# Altium PCB Sensor Bar 2.0 by GAO.PcbDoc (part 3 of 3)
Units mil, origin at the board's own origin, x right, y up, seen from the top; angles counter-clockwise.
Board outline 6710 x 1765 mil, 2 copper layers (Top Layer, Bottom Layer); 247 components, 162 nets, 624 pads, 280 vias.
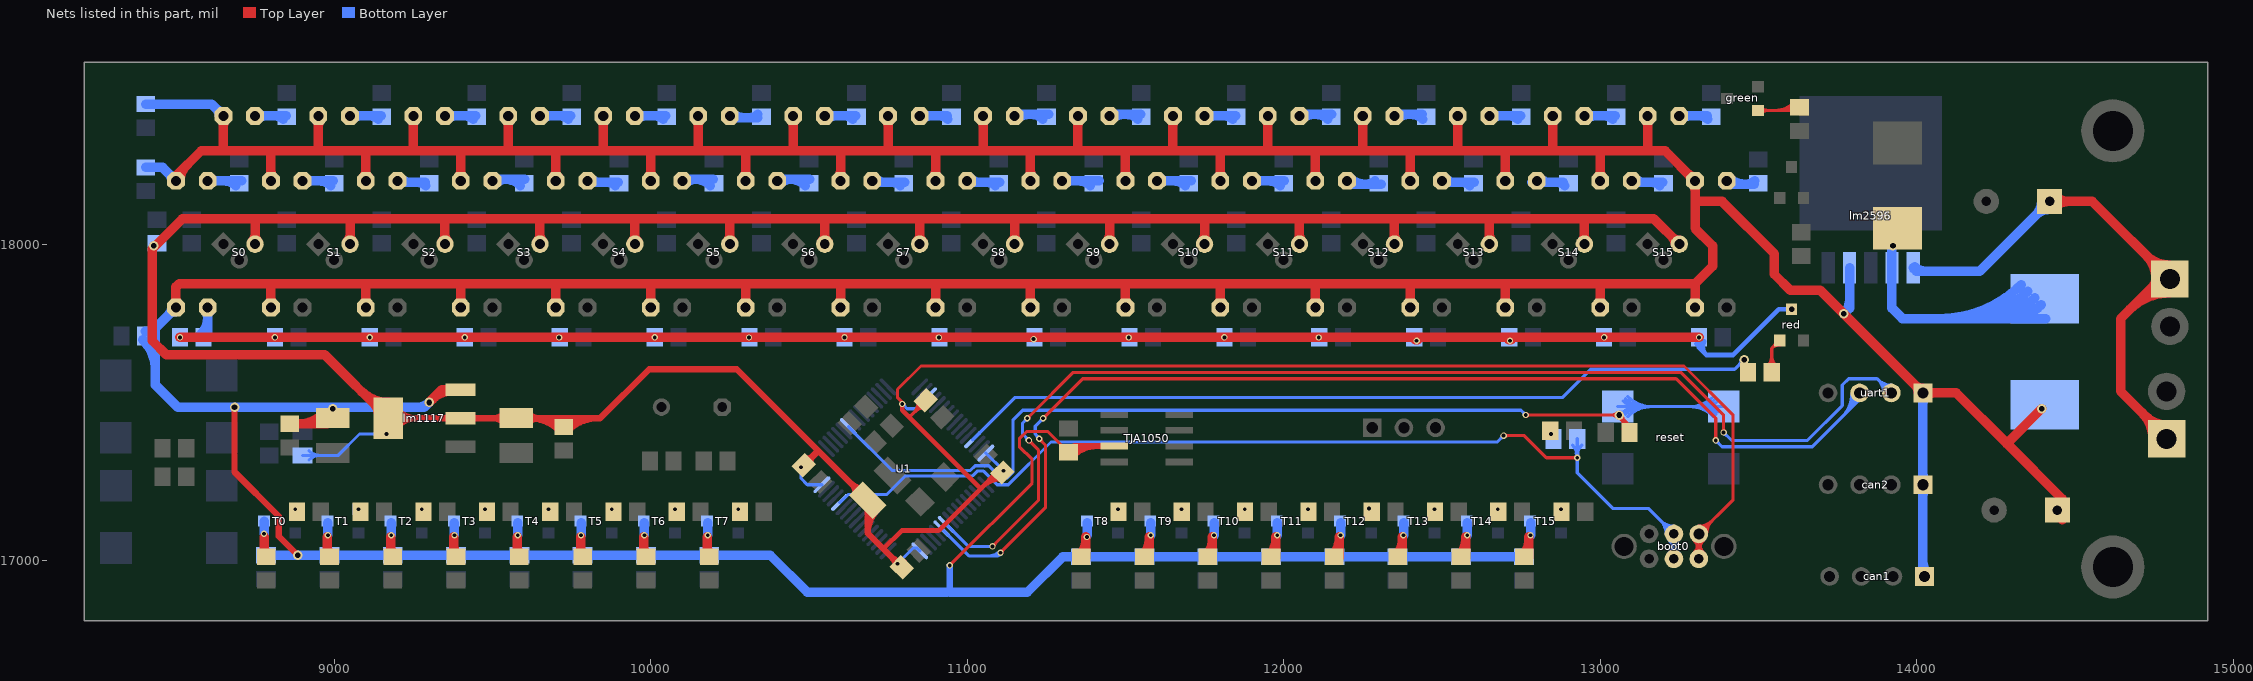
[diagram p3: the nets of this part, all layers, seen from the top]

## Via types
v1: diameter 30, hole 18, Top Layer to Bottom Layer, 141 vias
v2: diameter 20, hole 12, Top Layer to Bottom Layer, 139 vias

## Nets (pads, with @x,y where several pads share a name; then routed paths per layer and width w, separated by ;. In a path a pad name is that pad's centre, name@x,y a point inside that pad or via, vN(x,y) a via of type N, cw(c..) or ccw(c..) an arc to the next point about the centre after c; other vN are vias at no path point) (continued)
NetD17_2: D17.2 R20.2 | length 176
  Bottom Layer w30: D17.2@11159.19,18395.81 cw(c11193.46,18361.54) 11193.46,18410 ; D17.2@11159.61,18410 R20.2@11257.6,18410 ; 11203.02,18410 cw(c11203.02,18359.17) R20.2@11238.97,18395.11
NetD18_2: D18.2 R21.2 | length 176
  Bottom Layer w30: D18.2@11450,18410 R21.2@11547.99,18410 ; D18.2@11459.19,18395.81 cw(c11493.46,18361.54) 11493.46,18410 ; 11503.02,18410 cw(c11503.02,18359.17) R21.2@11538.97,18395.11
NetD19_2: D19.2 R22.2 | length 173.8
  Bottom Layer w30: D19.2@11750,18405 R22.2@11847.99,18405 ; D19.2@11759.19,18395.81 cw(c11781.38,18373.62) 11781.38,18405 cw(c11781.38,18436.38) D19.2@11759.19,18414.19 ; 11815.1,18405 cw(c11815.1,18371.24) R22.2@11838.97,18395.11
NetD20_2: D20.2 R23.2 | length 176
  Bottom Layer w30: D20.2@12054.61,18410 R23.2@12152.6,18410 ; D20.2@12059.19,18395.81 cw(c12093.46,18361.54) 12093.46,18410 ; 12103.02,18410 cw(c12103.02,18359.17) R23.2@12138.97,18395.11
NetD21_2: D21.2 R24.2 | length 176
  Bottom Layer w30: D21.2@12339.61,18410 R24.2@12437.6,18410 ; D21.2@12359.19,18395.81 cw(c12393.46,18361.54) 12393.46,18410 ; 12403.02,18410 cw(c12403.02,18359.17) R24.2@12438.97,18395.11
NetD22_2: D22.2 R25.2 | length 173.8
  Bottom Layer w30: D22.2@12650.4,18405 R25.2@12748.39,18405 ; D22.2@12659.19,18395.81 cw(c12681.38,18373.62) 12681.38,18405 cw(c12681.38,18436.38) D22.2@12659.19,18414.19 ; 12715.49,18405 cw(c12715.49,18371.24) R25.2@12739.36,18395.11
NetD23_2: D23.2 R26.2 | length 173.8
  Bottom Layer w30: D23.2@12950.4,18405 R26.2@13048.39,18405 ; D23.2@12959.19,18395.81 cw(c12981.38,18373.62) 12981.38,18405 cw(c12981.38,18436.38) D23.2@12959.19,18414.19 ; 13015.49,18405 cw(c13015.49,18371.24) R26.2@13039.36,18395.11
NetD24_2: D24.2 R27.2 | length 173.8
  Bottom Layer w30: D24.2@13239.61,18405 R27.2@13337.6,18405 ; D24.2@13259.19,18395.81 cw(c13281.39,18373.61) 13281.39,18405 cw(c13281.38,18436.38) D24.2@13259.19,18414.19 ; 13315.49,18405 cw(c13315.49,18371.24) R27.2@13339.36,18395.11
NetD25_2: D25.2 R37.2 | length 173.8
  Bottom Layer w30: D25.2@8750,18405 R37.2@8847.99,18405 ; D25.2@8759.19,18395.81 cw(c8781.38,18373.62) 8781.38,18405 cw(c8781.38,18436.38) D25.2@8759.19,18414.19 ; 8815.1,18405 cw(c8815.1,18371.24) R37.2@8838.97,18395.11
NetD26_2: D26.2 R29.2 | length 173.8
  Bottom Layer w30: D26.2@9050,18405 R29.2@9147.99,18405 ; D26.2@9059.19,18395.81 cw(c9081.38,18373.62) 9081.38,18405 cw(c9081.38,18436.38) D26.2@9059.19,18414.19 ; 9115.1,18405 cw(c9115.1,18371.24) R29.2@9138.97,18395.11
NetD27_2: D27.2 R30.2 | length 173.8
  Bottom Layer w30: D27.2@9350,18405 R30.2@9447.99,18405 ; D27.2@9359.19,18395.81 cw(c9381.38,18373.62) 9381.38,18405 cw(c9381.38,18436.38) D27.2@9359.19,18414.19 ; 9415.1,18405 cw(c9415.1,18371.24) R30.2@9438.97,18395.11
NetD28_2: D28.2 R31.2 | length 173.8
  Bottom Layer w30: D28.2@9650,18405 R31.2@9747.99,18405 ; D28.2@9659.19,18395.81 cw(c9681.38,18373.62) 9681.38,18405 cw(c9681.38,18436.38) D28.2@9659.19,18414.19 ; 9715.1,18405 cw(c9715.1,18371.24) R31.2@9738.97,18395.11
NetD29_2: D29.2 R32.2 | length 173.8
  Bottom Layer w30: D29.2@9950,18405 R32.2@10047.99,18405 ; D29.2@9959.19,18395.81 cw(c9981.38,18373.62) 9981.38,18405 cw(c9981.38,18436.38) D29.2@9959.19,18414.19 ; 10015.1,18405 cw(c10015.1,18371.24) R32.2@10038.97,18395.11
NetD30_2: D30.2 R33.2 | length 163.1
  Bottom Layer w30: D30.2@10239.61,18400 R33.2@10337.6,18400 ; D30.2@10259.19,18414.19 ccw(c10293.46,18448.46) 10293.46,18400 ; 10314.61,18400 ccw(c10314.61,18434.44) R33.2@10338.97,18410.09
NetD31_2: D31.2 R34.2 | length 173.8
  Bottom Layer w30: D31.2@10549.61,18405 R34.2@10647.6,18405 ; D31.2@10559.19,18395.81 cw(c10581.38,18373.62) 10581.38,18405 cw(c10581.38,18436.38) D31.2@10559.19,18414.19 ; 10615.1,18405 cw(c10615.1,18371.24) R34.2@10638.97,18395.11
NetD32_2: D32.2 R35.2 | length 173.8
  Bottom Layer w30: D32.2@10839.61,18405 R35.2@10937.6,18405 ; D32.2@10859.19,18395.81 cw(c10881.39,18373.61) 10881.39,18405 cw(c10881.38,18436.38) D32.2@10859.19,18414.19 ; 10915.1,18405 cw(c10915.1,18371.24) R35.2@10938.97,18395.11
NetD33_2: D33.2 R39.2 | length 187.2
  Bottom Layer w30: D33.2@11309.19,18190.81 cw(c11331.38,18168.62) 11331.38,18200 cw(c11331.38,18231.38) D33.2@11309.19,18209.19 ; D33.2@11319.61,18200 R39.2@11417.6,18200 ; 11352.63,18200 cw(c11352.63,18149.16) R39.2@11388.57,18185.11
NetD34_2: D34.2 R40.2 | length 187.2
  Bottom Layer w30: D34.2@11609.19,18190.81 cw(c11631.38,18168.62) 11631.38,18200 cw(c11631.38,18231.38) D34.2@11609.19,18209.19 ; D34.2@11609.61,18200 R40.2@11707.6,18200 ; 11652.63,18200 cw(c11652.63,18149.16) R40.2@11688.57,18185.11
NetD35_2: D35.2 R41.2 | length 187.2
  Bottom Layer w30: D35.2@11904.61,18200 R41.2@12002.6,18200 ; D35.2@11909.19,18190.81 cw(c11931.38,18168.62) 11931.38,18200 cw(c11931.38,18231.38) D35.2@11909.19,18209.19 ; 11952.63,18200 cw(c11952.63,18149.16) R41.2@11988.57,18185.11
NetD36_2: D36.2 R42.2 | length 176.5
  Bottom Layer w30: D36.2@12209.19,18209.19 ccw(c12255.53,18255.53) 12255.53,18190 ; D36.2@12209.61,18190 R42.2@12307.6,18190 ; 12264.22,18190 ccw(c12264.22,18224.44) R42.2@12288.57,18200.09
NetD37_2: D37.2 R43.2 | length 162.6
  Bottom Layer w30: D37.2@12504.61,18195 R43.2@12602.6,18195 ; D37.2@12509.19,18209.19 ccw(c12543.46,18243.46) 12543.46,18195 ; 12564.7,18195 cw(c12564.7,18161.23) R43.2@12588.57,18185.11
NetD38_2: D38.2 R44.2 | length 162.6
  Bottom Layer w30: D38.2@12784.61,18195 R44.2@12882.6,18195 ; D38.2@12809.19,18209.19 ccw(c12843.46,18243.46) 12843.46,18195 ; 12864.7,18195 cw(c12864.7,18161.23) R44.2@12888.57,18185.11
NetD39_2: D39.2 R45.2 | length 162.6
  Bottom Layer w30: D39.2@13099.61,18195 R45.2@13197.6,18195 ; D39.2@13109.19,18209.19 ccw(c13143.46,18243.46) 13143.46,18195 ; 13164.7,18195 cw(c13164.7,18161.23) R45.2@13188.57,18185.11
NetD40_2: D40.2 R46.2 | length 176.5
  Bottom Layer w30: D40.2@13389.61,18190 R46.2@13487.6,18190 ; D40.2@13409.19,18209.19 ccw(c13455.53,18255.53) 13455.53,18190 ; 13464.22,18190 ccw(c13464.22,18224.44) R46.2@13488.57,18200.09
NetD41_2: D41.2 R54.2 | length 187.2
  Bottom Layer w30: D41.2@8899.61,18200 R54.2@8997.6,18200 ; D41.2@8909.19,18190.81 cw(c8931.38,18168.62) 8931.38,18200 cw(c8931.38,18231.38) D41.2@8909.19,18209.19 ; 8952.63,18200 cw(c8952.63,18149.16) R54.2@8988.57,18185.11
NetD42_2: D42.2 R47.2 | length 162.6
  Bottom Layer w30: D42.2@9189.61,18195 R47.2@9287.6,18195 ; D42.2@9209.19,18209.19 ccw(c9243.46,18243.46) 9243.46,18195 ; 9264.7,18195 cw(c9264.7,18161.23) R47.2@9288.57,18185.11
NetD43_2: D43.2 R48.2 | length 189.4
  Bottom Layer w30: D43.2@9504.61,18205 R48.2@9602.6,18205 ; D43.2@9509.19,18190.81 cw(c9543.46,18156.54) 9543.46,18205 ; 9540.56,18205 cw(c9540.56,18137.09) R48.2@9588.57,18185.11
NetD44_2: D44.2 R49.2 | length 162.6
  Bottom Layer w30: D44.2@9799.61,18195 R49.2@9897.6,18195 ; D44.2@9809.19,18209.19 ccw(c9843.46,18243.46) 9843.46,18195 ; 9864.7,18195 cw(c9864.7,18161.23) R49.2@9888.57,18185.11
NetD45_2: D45.2 R50.2 | length 189.4
  Bottom Layer w30: D45.2@10099.61,18205 R50.2@10197.6,18205 ; D45.2@10109.19,18190.81 cw(c10143.46,18156.54) 10143.46,18205 ; 10140.56,18205 cw(c10140.56,18137.09) R50.2@10188.57,18185.11
NetD46_2: D46.2 R51.2 | length 189.4
  Bottom Layer w30: D46.2@10404.61,18205 R51.2@10502.6,18205 ; D46.2@10409.19,18190.81 cw(c10443.46,18156.54) 10443.46,18205 ; 10440.56,18205 cw(c10440.56,18137.09) R51.2@10488.57,18185.11
NetD47_2: D47.2 R52.2 | length 162.6
  Bottom Layer w30: D47.2@10704.61,18195 R52.2@10802.6,18195 ; D47.2@10709.19,18209.19 ccw(c10743.46,18243.46) 10743.46,18195 ; 10764.7,18195 cw(c10764.7,18161.23) R52.2@10788.57,18185.11
NetD48_2: D48.2 R53.2 | length 162.6
  Bottom Layer w30: D48.2@11004.61,18195 R53.2@11102.6,18195 ; D48.2@11009.19,18209.19 ccw(c11043.46,18243.46) 11043.46,18195 ; 11064.7,18195 cw(c11064.7,18161.23) R53.2@11088.57,18185.11
NetD49_2: D49.2 R104.2 | length 187.2
  Bottom Layer w30: D49.2@8609.19,18190.81 cw(c8631.38,18168.62) 8631.38,18200 cw(c8631.38,18231.38) D49.2@8609.19,18209.19 ; D49.2@8609.61,18200 R104.2@8707.6,18200 ; 8652.63,18200 cw(c8652.63,18149.16) R104.2@8688.57,18185.11
NetD50_2: D50.2 R105.2 | length 185.2
  Bottom Layer w30: R105.2@8579.91,17716.82 ccw(c8531.42,17765.31) 8600,17765.31 ; D50.2@8590.81,17790.81 cw(c8568.62,17768.62) 8600,17768.62 cw(c8631.38,17768.62) D50.2@8609.19,17790.81 ; R105.2@8600,17717.99 D50.2@8600,17800
Netgreen_1: green.1 R36.2 | length 321.1
  Top Layer w10: green.1@13499.21,18422.6 R36.2@13620.2,18422.6 ; green.1@13509.19,18413.61 cw(c13530.9,18391.9) 13530.9,18422.6 cw(c13530.9,18453.3) green.1@13509.19,18431.59 ; 13552.69,18422.6 ccw(c13552.69,18505.78) R36.2@13611.5,18446.96 ; 13576.83,18422.6 ccw(c13576.83,18481.64) R36.2@13618.57,18439.89 ; 13600.02,18422.6 cw(c13600.02,18406.36) R36.2@13611.5,18417.84 ; R36.2@13600.97,18422.6 ccw(c13600.97,18457.49) R36.2@13625.65,18432.82
NetL2_1: L2.1 lm2596.2 schottky.1 | length 1535.4
  Bottom Layer w30: 13922,17848 lm2596.2@13922,17925 v1@13922,17992 ; lm2596.2@13922,17880 13922,17798 13955,17765 L2.1@14407.17,17765 ; 14070.99,17765 ccw(c14070.99,18131.66) L2.1@14330.25,17872.39 ; 14143.41,17765 ccw(c14143.41,18059.23) L2.1@14351.46,17851.18 ; 14215.84,17765 ccw(c14215.84,17986.8) L2.1@14372.68,17829.96 ; 14288.27,17765 ccw(c14288.27,17914.38) L2.1@14393.89,17808.75
  other v1: 13925,17995
NetR3_2: R3.2 v_usb.2
  other v2: 12845,17400
NetR28_2: R28.2 red.1 | length 237.5
  Top Layer w10: R28.2@13527.84,17613.5 ccw(c13492.69,17648.65) 13542.4,17648.65 ccw(c13592.11,17648.65) R28.2@13556.96,17613.5 ; R28.2@13542.4,17595 13542.4,17670.59 red.1@13567.6,17695.79 ; 13544.21,17672.4 cw(c13567.6,17649.01) red.1@13567.6,17682.09 ; 13546.59,17674.78 ccw(c13526.56,17694.8) red.1@13554.88,17694.8
NetR72_1: R72.1 T0.3 | length 133.4
  Top Layer w30: R72.1@8778.29,17009.11 8778.29,17075 ; 8778.29,17044.66 ccw(c8813.32,17044.66) R72.1@8788.55,17019.89
  Bottom Layer w30: v2(8778.29,17085) T0.3@8778.29,17125
NetR73_1: R73.1 T1.3 | length 133.4
  Top Layer w30: R73.1@8978.29,17009.11 v2@8978.29,17075 ; 8978.29,17044.66 ccw(c9013.32,17044.66) R73.1@8988.55,17019.89
  Bottom Layer w30: v2(8980,17080) T1.3@8980,17120
NetR74_1: R74.1 T2.3 | length 133.4
  Top Layer w30: R74.1@9178.29,17009.11 v2@9178.29,17075 ; 9178.29,17044.66 ccw(c9213.32,17044.66) R74.1@9188.55,17019.89
  Bottom Layer w30: v2(9180,17080) T2.3@9180,17120
NetR75_1: R75.1 T3.3 | length 133.4
  Top Layer w30: R75.1@9378.29,17009.11 v2@9378.29,17075 ; 9378.29,17044.66 ccw(c9413.32,17044.66) R75.1@9388.55,17019.89
  Bottom Layer w30: v2(9380,17080) T3.3@9380,17120
NetR76_1: R76.1 T4.3 | length 133.4
  Top Layer w30: R76.1@9578.29,17009.11 v2@9578.29,17075 ; 9578.29,17044.66 ccw(c9613.32,17044.66) R76.1@9588.55,17019.89
  Bottom Layer w30: v2(9580,17080) T4.3@9580,17120
NetR77_1: R77.1 T5.3 | length 133.4
  Top Layer w30: R77.1@9778.29,17009.11 v2@9778.29,17075 ; 9778.29,17044.66 ccw(c9813.32,17044.66) R77.1@9788.55,17019.89
  Bottom Layer w30: v2(9780,17080) T5.3@9780,17120
NetR78_1: R78.1 T6.3 | length 133.4
  Top Layer w30: R78.1@9978.29,17009.11 v2@9978.29,17075 ; 9978.29,17044.66 ccw(c10013.32,17044.66) R78.1@9988.55,17019.89
  Bottom Layer w30: v2(9980,17080) T6.3@9980,17120
NetR79_1: R79.1 T7.3 | length 133.4
  Top Layer w30: R79.1@10178.29,17009.11 v2@10178.29,17075 ; 10178.29,17044.66 ccw(c10213.32,17044.66) R79.1@10188.55,17019.89
  Bottom Layer w30: v2(10180,17080) T7.3@10180,17120
NetR80_1: R80.1 T0.1
  other v2: 8876.72,17162.4
NetR81_1: R81.1 T1.1
  other v2: 9076.72,17162.4
NetR82_1: R82.1 T2.1
  other v2: 9276.72,17162.4
NetR83_1: R83.1 T3.1
  other v2: 9476.72,17162.4
NetR84_1: R84.1 T4.1
  other v2: 9676.72,17162.4
NetR85_1: R85.1 T5.1
  other v2: 9876.72,17162.4
NetR86_1: R86.1 T6.1
  other v2: 10076.72,17162.4
NetR87_1: R87.1 T7.1
  other v2: 10276.72,17162.4
NetR88_1: R88.1 T8.3 | length 155.6
  Top Layer w30: R88.1@11356.45,17019.89 ccw(c11311.66,17064.68) 11375,17064.68 ; R88.1@11375,17009.11 v2@11375,17075
  Bottom Layer w30: v2@11380,17080 T8.3@11380,17120
  other v2: 11378.29,17075
NetR89_1: R89.1 T9.3 | length 155.6
  Top Layer w30: R89.1@11556.45,17019.89 ccw(c11511.66,17064.68) 11575,17064.68 ; R89.1@11575,17009.11 v2@11575,17075
  Bottom Layer w30: v2(11580,17080) T9.3@11580,17120
NetR90_1: R90.1 T10.3 | length 155.6
  Top Layer w30: R90.1@11756.45,17019.89 ccw(c11711.66,17064.68) 11775,17064.68 ; R90.1@11775,17009.11 v2@11775,17075
  Bottom Layer w30: v2(11780,17080) T10.3@11780,17120
NetR91_1: R91.1 T11.3 | length 155.6
  Top Layer w30: R91.1@11956.45,17019.89 ccw(c11911.66,17064.68) 11975,17064.68 ; R91.1@11975,17009.11 v2@11975,17075
  Bottom Layer w30: v2(11980,17080) T11.3@11980,17120
NetR92_1: R92.1 T12.3 | length 155.6
  Top Layer w30: R92.1@12156.45,17019.89 ccw(c12111.66,17064.68) 12175,17064.68 ; R92.1@12175,17009.11 v2@12175,17075
  Bottom Layer w30: v2(12180,17080) T12.3@12180,17120
NetR93_1: R93.1 T13.3 | length 155.6
  Top Layer w30: R93.1@12356.45,17019.89 ccw(c12311.66,17064.68) 12375,17064.68 ; R93.1@12375,17009.11 v2@12375,17075
  Bottom Layer w30: v2@12380,17080 T13.3@12380,17120
  other v2: 12378.29,17080
NetR94_1: R94.1 T14.3 | length 155.6
  Top Layer w30: R94.1@12556.45,17019.89 ccw(c12511.66,17064.68) 12575,17064.68 ; R94.1@12575,17009.11 v2@12575,17075
  Bottom Layer w30: v2(12580,17080) T14.3@12580,17120
NetR95_1: R95.1 T15.3 | length 155.6
  Top Layer w30: R95.1@12756.45,17019.89 ccw(c12711.66,17064.68) 12775,17064.68 ; R95.1@12775,17009.11 v2@12775,17075
  Bottom Layer w30: v2(12780,17080) T15.3@12780,17120
NetR96_1: R96.1 T8.1
  other v2: 11476.72,17162.4
NetR97_1: R97.1 T9.1
  other v2: 11676.72,17162.4
NetR98_1: R98.1 T10.1
  other v2: 11876.72,17162.4
NetR99_1: R99.1 T11.1
  other v2: 12076.72,17162.4
NetR100_1: R100.1 T12.1
  other v2: 12270,17165
NetR101_1: R101.1 T13.1
  other v2: 12476.72,17162.4
NetR102_1: R102.1 T14.1
  other v2: 12676.72,17162.4
NetR103_1: R103.1 T15.1
  other v2: 12876.72,17162.4
NRST: C13.1 reset.2 U1.7 | length 4233.9
  Top Layer w10: v2(12765,17460) v1(13060,17460) ; v2@12768.54,17456.46 cw(c12777.07,17447.93) 12777.07,17460 cw(c12777.07,17472.07) v2@12768.54,17463.54 ; v1@13052.93,17452.93 ccw(c13035.86,17435.86) 13035.86,17460 ccw(c13035.86,17484.14) v1@13052.93,17467.07 ; v1@13060,17450 cw(c13060,17425.86) 13077.07,17442.93 cw(c13094.14,17460) v1@13070,17460 ; v1@13062.32,17450.27 cw(c13064.71,17440.22) 13073.66,17445.39 ; v1@13069.66,17457.41 ccw(c13092.98,17451.16) 13072.07,17439.09 ccw(c13051.16,17427.02) 13057.41,17450.34 cw(c13047.17,17412.11) C13.1@13081.45,17431.9 ; 13072.35,17447.65 cw(c13045.77,17421.07) C13.1@13082.15,17411.6 ; C13.1@13072.47,17414.12 ccw(c13026.17,17426.17) v1(13060,17460) ; 13084.7,17435.3 cw(c13065.38,17415.97) C13.1@13091.83,17409.09 ; C13.1@13092.4,17427.6 v1(13060,17460)
  Bottom Layer w10: U1.7@10624.62,17423.63 10763.24,17285 11010,17285 11025,17300 11067.9,17300 11105.89,17262.01 11127.01,17262.01 11145,17280 11145,17445 11175,17475 12750,17475 v2(12765,17460) ; v2@12760,17460 ccw(c12747.93,17460) 12756.46,17468.54 ccw(c12765,17477.07) v2@12765,17465 ; reset.2@13055.35,17486.85 reset.2@13390,17486.85 ; reset.2@13062.59,17469.66 ccw(c13067.57,17488.27) reset.2@13077.21,17471.58 ; reset.2@13069.66,17457.41 cw(c13097.69,17449.9) reset.2@13083.18,17475.03 ; reset.2@13073.03,17469.17 cw(c13115.71,17426.5) 13115.71,17486.85 cw(c13115.71,17547.21) reset.2@13073.03,17504.53 ; reset.2@13080.1,17462.1 cw(c13139.85,17402.35) 13139.85,17486.85 cw(c13139.85,17571.35) reset.2@13080.1,17511.6 ; reset.2@13087.17,17455.03 cw(c13163.99,17378.21) 13163.99,17486.85 cw(c13163.99,17595.49) reset.2@13087.17,17518.67 ; reset.2@13358.18,17455.03 ccw(c13281.36,17378.21) 13281.36,17486.85 ccw(c13281.36,17595.49) reset.2@13358.18,17518.67 ; reset.2@13365.25,17462.1 ccw(c13305.5,17402.35) 13305.5,17486.85 ccw(c13305.5,17571.35) reset.2@13365.25,17511.6 ; reset.2@13372.32,17469.17 ccw(c13329.64,17426.5) 13329.64,17486.85 ccw(c13329.64,17547.21) reset.2@13372.32,17504.53
RED: R28.1 U1.29 | length 2691
  Top Layer w10: v1@13447.93,17627.93 cw(c13430.86,17610.86) 13455,17610.86 cw(c13479.14,17610.86) v1@13462.07,17627.93 ; R28.1@13455,17607.6 v1(13455,17635) ccw(c13470.6,17635) R28.1@13469.3,17619.46 ; R28.1@13455,17624.13 ccw(c13469.69,17624.13) R28.1@13468.48,17609.49
  Bottom Layer w10: U1.29@11017.14,17381.87 11150.27,17515 12880,17515 12970,17605 13425,17605 v1(13455,17635) ; v1@13445,17635 cw(c13420.86,17635) 13437.93,17617.93 cw(c13455,17600.86) v1@13455,17625
REDGND: R4.1 R5.1 R6.1 R7.1 R8.1 R9.1 R10.1 R11.1 R12.1 R13.1 R14.1 R15.1 R16.1 R17.1 R18.1 R19.1 R105.1 red.3 | length 5425.5
  Top Layer w30: v2(8512.6,17705.4) v2(8812.6,17705.4) v2(9112.6,17705.4) v2(9412.6,17705.4) v2(10012.6,17705.4) v2(10612.6,17705.4) v2(11812.6,17705.4) 12715,17705.4 v2(13012.6,17705.4) v2(13312.6,17705.4) ; 12406.97,17705.4 cw(c12406.97,17681.97) v2@12423.54,17698.54 ; v2@12416.46,17698.54 cw(c12433.03,17681.97) 12433.03,17705.4 ; 12701.97,17705.4 cw(c12701.97,17681.97) v2@12718.54,17698.54 ; v2@12711.46,17698.54 cw(c12728.03,17681.97) 12728.03,17705.4
  Bottom Layer w15: R18.1@13304.62,17685.22 cw(c13298.31,17672.4) 13312.6,17672.4 ; R18.1@13310.73,17703.74 cw(c13301.18,17695.32) R18.1@13313.59,17692.45 ; v2(13312.6,17705.4) 13312.6,17672.4 ; R18.1@13315.33,17700.01 ccw(c13342.1,17685.78) 13320.66,17664.34 ; R18.1@13320.58,17685.22 ccw(c13326.89,17672.4) 13312.6,17672.4 ; R18.1@13328.57,17692.97 ccw(c13360.82,17675.83) 13335,17650 ; v1@13599.7,17788.91 ccw(c13586.89,17776.11) 13586.89,17794.21 ccw(c13586.89,17812.32) v1@13599.7,17799.52 ; v1(13605,17794.21) 13564.21,17794.21 13420,17650 13335,17650 ; 13312.6,17672.4 13335,17650
  other v2: 12420,17695 12715,17695 11210,17700 9710.63,17705 10310.63,17705 10910.63,17705 11510.63,17705 12110.63,17705
UART1_RX: U1.43 uart1.3 | length 3952
  Top Layer w10: v2(11105,17025) 11247,17167 11247,17365.5 v2(11227.5,17385) ; v2@11105,17030 ccw(c11105,17042.07) 11113.54,17033.54 ccw(c11122.07,17025) v2@11110,17025 ; v2@11227.5,17380 cw(c11227.5,17367.93) 11236.04,17376.46 cw(c11244.57,17385) v2@11232.5,17385 ; v2(11240,17450) 11365,17575 13240,17575 13365,17450 v2(13365,17380) ; v2@11240,17455 ccw(c11240,17467.07) 11248.54,17458.54 ccw(c11257.07,17450) v2@11245,17450 ; v2@13361.46,17383.54 ccw(c13352.93,17392.07) 13365,17392.07 ccw(c13377.07,17392.07) v2@13368.54,17383.54
  Bottom Layer w10: U1.43@10919.71,17100.7 11005.4,17015 11095,17015 v2(11105,17025) ; 11068.79,17015 ccw(c11068.79,17061.21) v2@11101.46,17028.54 ; 11092.93,17015 ccw(c11092.93,17037.07) v2@11108.54,17021.46 ; 11217.2,17397.8 cw(c11204.39,17385) v2@11222.5,17385 ; v2(11227.5,17385) 11230,17385 11215,17400 11215,17425 v2(11240,17450) ; v2@11235,17450 cw(c11222.93,17450) 11231.46,17441.46 cw(c11240,17432.93) v2@11240,17445 ; v2@13365,17375 cw(c13365,17362.93) 13373.54,17371.46 cw(c13382.07,17380) v2@13370,17380 ; v2(13365,17380) 13385,17360 13670,17360 uart1.3@13830,17520 ; 13763.99,17453.99 ccw(c13687.97,17530) uart1.3@13795.47,17530 ; 13781.06,17471.06 ccw(c13722.12,17530) uart1.3@13805.47,17530 ; 13798.13,17488.13 ccw(c13756.26,17530) uart1.3@13815.47,17530
UART1_TX: U1.42 uart1.2 | length 4034.8
  Top Layer w10: v2(11080,17045) 11225,17190 11225,17350 v2(11195,17380) ; v2@11080,17050 ccw(c11080,17062.07) 11088.54,17053.54 ccw(c11097.07,17045) v2@11085,17045 ; v2(11190,17450) 11200,17460 11335,17595 13255,17595 13390,17460 v2(13390,17405) ; v2@11195,17375 cw(c11195,17362.93) 11203.54,17371.46 cw(c11212.07,17380) v2@11200,17380 ; v2@13386.46,17408.54 ccw(c13377.93,17417.07) 13390,17417.07 ccw(c13402.07,17417.07) v2@13393.54,17408.54 ; v2@11190,17455 ccw(c11190,17467.07) 11198.54,17458.54 ; v2@11190,17455 ccw(c11190,17467.07) 11198.54,17458.54 ; v2@11190,17455 ccw(c11190,17467.07) 11198.54,17458.54 ; v2@11195,17450 cw(c11207.07,17450) 11198.54,17458.54 ; v2@11195,17450 cw(c11207.07,17450) 11198.54,17458.54 ; v2@11195,17450 cw(c11207.07,17450) 11198.54,17458.54
  Bottom Layer w10: U1.42@10933.63,17114.62 11003.24,17045 v2(11080,17045) ; v2@11185,17450 cw(c11172.93,17450) 11181.46,17441.46 cw(c11190,17432.93) v2@11190,17445 ; v2@11190,17380 ccw(c11177.93,17380) 11186.46,17388.54 ccw(c11195,17397.07) v2@11195,17385 ; v2(11190,17450) 11175,17435 11175,17400 v2(11195,17380) ; v2@13390,17400 cw(c13390,17387.93) 13398.54,17396.46 cw(c13407.07,17405) v2@13395,17405 ; v2(13390,17405) 13415,17380 13655,17380 13765,17490 13765,17555 13785,17575 13875,17575 uart1.2@13920,17530 ; uart1.2@13895.47,17530 ccw(c13836.26,17530) 13878.13,17571.87 ccw(c13920,17613.74) uart1.2@13920,17554.53 ; uart1.2@13905.47,17530 ccw(c13870.4,17530) 13895.2,17554.8 ccw(c13920,17579.6) uart1.2@13920,17544.53
USB: boot0.3 boot0.4 U1.60 v_usb.1 | length 3792.5
  Top Layer w10: v2(12695,17395) 12760,17395 12830,17325 v2(12927.4,17325) ; v2@12698.54,17391.46 cw(c12707.07,17382.93) 12707.07,17395 cw(c12707.07,17407.07) v2@12698.54,17398.54 ; v2@12923.87,17321.46 ccw(c12915.33,17312.93) 12915.33,17325 ccw(c12915.33,17337.07) v2@12923.87,17328.54
  Bottom Layer w10: U1.60@10596.78,17184.21 10599.29,17184.21 10624.16,17209.08 10746.08,17209.08 10805,17268 11017.04,17268 11032.04,17283 11052,17283 11095,17240 11130,17240 11265,17375 12675,17375 v2(12695,17395) ; v2@12690,17395 cw(c12677.93,17395) 12686.46,17386.46 cw(c12695,17377.93) v2@12695,17390 ; v_usb.1@12912.84,17364.53 cw(c12877.69,17329.38) 12927.4,17329.38 cw(c12977.11,17329.38) v_usb.1@12941.96,17364.53 ; v2@12923.07,17327.5 ccw(c12909.26,17335.47) 12924.66,17339.6 ; v2@12923.87,17321.46 cw(c12915.33,17312.93) 12927.4,17312.93 cw(c12939.47,17312.93) v2@12930.94,17321.46 ; v2@12923.87,17328.54 ccw(c12915.33,17337.07) 12927.4,17337.07 ccw(c12939.47,17337.07) v2@12930.94,17328.54 ; v_usb.1@12927.4,17385 12927.4,17277.6 13040,17165 13152.52,17165 boot0.4@13233.15,17084.37 boot0.3@13233.15,17005.63 ; 12930.14,17339.6 ccw(c12945.54,17335.47) v2@12931.73,17327.5 ; boot0.4@13208.62,17084.37 ccw(c13149.41,17084.37) 13191.28,17126.24 ccw(c13233.15,17168.11) boot0.4@13233.15,17108.9 ; boot0.3@13215.81,17022.97 ccw(c13173.94,17064.84) 13233.15,17064.84 ccw(c13292.36,17064.84) boot0.3@13250.49,17022.97 ; boot0.4@13215.81,17067.03 cw(c13173.94,17025.16) 13233.15,17025.16 cw(c13292.36,17025.16) boot0.4@13250.49,17067.03 ; boot0.4@13218.62,17084.37 ccw(c13183.55,17084.37) 13208.35,17109.17 ccw(c13233.15,17133.97) boot0.4@13233.15,17098.9 ; boot0.4@13219.77,17063.81 cw(c13209.77,17048.44) 13227.48,17043.69 cw(c13254.39,17036.48) boot0.4@13243.1,17061.95 ; boot0.3@13222.88,17015.9 ccw(c13198.08,17040.7) 13233.15,17040.7 ccw(c13268.22,17040.7) boot0.3@13243.42,17015.9 ; boot0.4@13222.88,17074.1 cw(c13198.08,17049.3) 13233.15,17049.3 cw(c13268.22,17049.3) boot0.4@13243.42,17074.1 ; boot0.4@13223.2,17061.95 cw(c13211.91,17036.48) 13238.82,17043.69 cw(c13256.53,17048.44) boot0.4@13246.53,17063.81
VCC3.3V: 1.1 boot0.1 boot0.2 C4.2 C5.2 C6.2 C7.2 C14.2 C17.1 C21.1 L1.2 lm1117.2 lm1117.4 S0.3 S1.3 S2.3 S3.3 S4.3 S5.3 S6.3 S7.3 S8.3 S9.3 S10.3 S11.3 S12.3 S13.3 S14.3 S15.3 U1.19 U1.32 U1.48 U1.64 | length 17116.3
  Top Layer w10: v2(10795,17495) 10795,17500.52 10779.63,17515.89 10779.63,17534.48 10780,17534.85 10780,17540.99 10854.01,17615 13265,17615 13420,17460 13420,17192.48 boot0.2@13311.89,17084.37 boot0.1@13311.89,17005.63 ; 10817.5,17452.5 10868.55,17503.55 C7.2@10868.55,17506.45 ; 10828.57,17463.57 ccw(c10788.48,17503.66) C7.2@10845.18,17503.66 ; 10835.56,17470.56 cw(c10865.77,17440.35) C7.2@10865.77,17483.07 ; 10845.64,17480.64 ccw(c10822.62,17503.66) C7.2@10855.18,17503.66 ; boot0.1@13294.55,17022.97 ccw(c13252.68,17064.84) 13311.89,17064.84 ccw(c13371.11,17064.85) boot0.1@13329.23,17022.97 ; boot0.2@13294.55,17067.03 cw(c13252.68,17025.16) 13311.89,17025.16 cw(c13371.1,17025.16) boot0.2@13329.23,17067.03 ; boot0.2@13298.51,17063.81 cw(c13288.51,17048.44) 13306.22,17043.69 cw(c13333.13,17036.48) boot0.2@13321.84,17061.95 ; boot0.1@13301.62,17015.9 ccw(c13276.82,17040.7) 13311.89,17040.7 ccw(c13346.96,17040.7) boot0.1@13322.16,17015.9 ; boot0.2@13301.62,17074.1 cw(c13276.82,17049.3) 13311.89,17049.3 cw(c13346.96,17049.3) boot0.2@13322.16,17074.1 ; boot0.2@13301.94,17061.95 cw(c13290.65,17036.48) 13317.56,17043.69 cw(c13335.27,17048.44) boot0.2@13325.27,17063.81 ; boot0.2@13311.89,17098.9 ccw(c13311.89,17133.97) 13336.69,17109.17 ccw(c13361.49,17084.37) boot0.2@13326.42,17084.37 ; boot0.2@13311.89,17108.9 ccw(c13311.89,17168.11) 13353.76,17126.24 ccw(c13395.63,17084.37) boot0.2@13336.42,17084.37
  Top Layer w15: 10735,17037.11 10792.89,17095 10910,17095 11042.5,17227.5 ; v2(10795,17495) 10795,17475 10817.5,17452.5 ; 10817.5,17455.39 10817.5,17452.5 ; 11047.23,17232.23 cw(c11108.66,17170.8) C6.2@11108.66,17257.68 ; 11072.84,17257.84 cw(c11108.66,17222.02) C6.2@11108.66,17272.68 ; C6.2@11093.55,17278.55 11042.5,17227.5 ; 10817.5,17452.5 11042.5,17227.5
  Top Layer w20: lm1117.4@9170.83,17450 lm1117.2@9399.17,17450 9840,17450 9995,17605 10272.05,17605 L1.2@10686.03,17191.03 10686.03,17086.08 10735,17037.11 C4.2@10793.55,16978.55 ; lm1117.4@9197.16,17423.66 cw(c9260.74,17360.08) 9260.74,17450 cw(c9260.74,17539.92) lm1117.4@9197.16,17476.34 ; lm1117.2@9364.77,17443.15 ccw(c9348.23,17426.62) 9348.23,17450 ccw(c9348.23,17473.38) lm1117.2@9364.77,17456.85 ; lm1117.2@9433.58,17443.15 cw(c9450.11,17426.62) 9450.11,17450 cw(c9450.11,17473.38) lm1117.2@9433.58,17456.85 ; 9501.17,17450 ccw(c9501.17,17502.3) C17.1@9538.15,17465.32 ; 9501.74,17450 cw(c9501.74,17398.51) C17.1@9538.15,17434.92 ; C17.1@9611.85,17434.92 cw(c9648.26,17398.51) 9648.26,17450 ; C17.1@9611.85,17465.32 ccw(c9648.83,17502.3) 9648.83,17450 ; C17.1@9616.8,17450 cw(c9616.8,17318.13) C14.2@9710.04,17411.38 ; 9665.08,17450 cw(c9665.08,17366.42) C14.2@9724.18,17425.52 ; C14.2@9711.68,17439.66 cw(c9736.64,17414.7) 9736.64,17450 ; 9713.36,17450 cw(c9713.36,17414.7) C14.2@9738.32,17439.66 ; C14.2@9725.82,17425.52 cw(c9784.92,17366.42) 9784.92,17450 ; C14.2@9739.96,17411.38 cw(c9833.2,17318.13) 9833.2,17450 ; v2(10475,17295) ccw(c10465.04,17310.6) 10483.55,17310.6 C5.2@10483.55,17301.45 10527.05,17344.94 ; C5.2@10486.34,17319.82 ccw(c10486.34,17357.46) 10512.95,17330.85 ccw(c10539.57,17304.23) C5.2@10501.93,17304.23 ; L1.2@10649.22,17206.34 ccw(c10597.32,17206.34) 10634.02,17243.03 ccw(c10670.71,17279.73) L1.2@10670.71,17227.83 ; 10686.03,17086.85 cw(c10790.2,17086.85) L1.2@10716.54,17160.51 ; 10686.03,17135.14 cw(c10741.91,17135.14) L1.2@10702.39,17174.66 ; 10766.6,17006.62 cw(c10753.24,16982.14) v2(10780,16990) ; 10769.03,17004.3 ccw(c10791.78,17010.4) v2(10780,16990) ; C4.2@10775.18,16981.34 ccw(c10737.54,16981.34) 10764.15,17007.95 ccw(c10790.77,17034.57) C4.2@10790.77,16996.93 ; C4.2@10800.15,16995.92 ccw(c10797.22,16968.64) v2(10780,16990)
  Top Layer w30: S0.3@8741.12,18008.88 ccw(c8719.68,18030.32) 8750,18030.32 ccw(c8780.32,18030.32) S0.3@8758.88,18008.88 ; S0.3@8750,18000 8750,18080 ; S1.3@9041.12,18008.88 ccw(c9019.68,18030.32) 9050,18030.32 ccw(c9080.32,18030.32) S1.3@9058.88,18008.88 ; S1.3@9050,18000 9050,18080 ; 9085.54,17535.29 ccw(c9170.83,17620.58) lm1117.4@9170.83,17499.96 ; lm1117.4@9128.31,17492.52 cw(c9103.51,17467.72) lm1117.4@9138.58,17467.72 ; lm1117.4@9170.83,17450 8970.83,17650 8470,17650 8425,17695 8425,17985 8520,18080 8750,18080 ; S2.3@9341.12,18008.88 ccw(c9319.68,18030.32) 9350,18030.32 ccw(c9380.32,18030.32) S2.3@9358.88,18008.88 ; S2.3@9350,18000 9350,18080 ; S3.3@9641.12,18008.88 ccw(c9619.68,18030.32) 9650,18030.32 ccw(c9680.32,18030.32) S3.3@9658.88,18008.88 ; S3.3@9650,18000 9650,18065 ; S4.3@9941.12,18008.88 ccw(c9919.68,18030.32) 9950,18030.32 ccw(c9980.32,18030.32) S4.3@9958.88,18008.88 ; S4.3@9950,18000 9950,18075 ; S5.3@10241.12,18008.88 ccw(c10219.68,18030.32) 10250,18030.32 ccw(c10280.32,18030.32) S5.3@10258.88,18008.88 ; S5.3@10250,18000 10250,18080 ; S6.3@10541.12,18008.88 ccw(c10519.68,18030.32) 10550,18030.32 ccw(c10580.32,18030.32) S6.3@10558.88,18008.88 ; S6.3@10550,18000 10550,18075 ; S7.3@10841.12,18008.88 ccw(c10819.68,18030.32) 10850,18030.32 ccw(c10880.32,18030.32) S7.3@10858.88,18008.88 ; S7.3@10850,18000 10850,18075 ; S8.3@11141.12,18008.88 ccw(c11119.68,18030.32) 11150,18030.32 ccw(c11180.32,18030.32) S8.3@11158.88,18008.88 ; S8.3@11150,18000 11150,18080 ; S9.3@11441.12,18008.88 ccw(c11419.68,18030.32) 11450,18030.32 ccw(c11480.32,18030.32) S9.3@11458.88,18008.88 ; S9.3@11450,18000 11450,18080 ; S10.3@11741.12,18008.88 ccw(c11719.68,18030.32) 11750,18030.32 ccw(c11780.32,18030.32) S10.3@11758.88,18008.88 ; S10.3@11750,18000 11750,18080 ; S11.3@12041.12,18008.88 ccw(c12019.68,18030.32) 12050,18030.32 ccw(c12080.32,18030.32) S11.3@12058.88,18008.88 ; S11.3@12050,18000 12050,18080 ; S12.3@12341.12,18008.88 ccw(c12319.68,18030.32) 12350,18030.32 ccw(c12380.32,18030.32) S12.3@12358.88,18008.88 ; S12.3@12350,18000 12350,18075 ; S13.3@12641.12,18008.88 ccw(c12619.68,18030.32) 12650,18030.32 ccw(c12680.32,18030.32) S13.3@12658.88,18008.88 ; S13.3@12650,18000 12650,18075 ; S14.3@12941.12,18008.88 ccw(c12919.68,18030.32) 12950,18030.32 ccw(c12980.32,18030.32) S14.3@12958.88,18008.88 ; S14.3@12950,18000 12950,18080 ; S15.3@13237.44,18000 ccw(c13207.12,18000) 13228.56,18021.44 ccw(c13250,18042.88) S15.3@13250,18012.56 ; S15.3@13250,18000 13170,18080 12950,18080 ; 8750,18080 9050,18080 ; 9050,18080 9350,18080 ; 9350,18080 10250,18080 ; 10250,18080 11150,18080 ; 11150,18080 11450,18080 ; 11450,18080 11750,18080 ; 11750,18080 12050,18080 ; 12050,18080 12950,18080
  Bottom Layer w10: 1.1@8900,17332.6 9012.6,17332.6 9080,17400 v2(9165,17400) ; 1.1@8920.46,17318.04 cw(c8955.62,17282.89) 8955.62,17332.6 cw(c8955.62,17382.31) 1.1@8920.46,17347.16 ; v2@9161.46,17396.46 ccw(c9152.93,17387.93) 9152.93,17400 ccw(c9152.93,17412.07) v2@9161.46,17403.54 ; v2@10471.46,17291.46 cw(c10462.93,17282.93) 10475,17282.93 cw(c10487.07,17282.93) v2@10478.54,17291.46 ; v2(10475,17295) 10475,17260 10495.11,17239.89 U1.64@10541.1,17239.89 ; v2(10780,16990) 10830,17040 10841.21,17040 U1.48@10850.11,17031.1 ; v2@10780,16995 ccw(c10780,17007.07) 10788.54,16998.54 ccw(c10797.07,16990) v2@10785,16990 ; v2@10795,17490 cw(c10795,17477.93) 10803.54,17486.46 cw(c10812.07,17495) v2@10800,17495 ; v2(10795,17495) 10810,17480 10836.89,17480 U1.19@10877.95,17521.06 ; U1.32@11058.9,17340.11 v2(11115,17284.01)
  other v1: 8430,17995
VCC5V: C2.2 C15.1 C16.2 C19.1 C20.1 C22.1 C23.1 can1.1 can2.1 D1.1 D2.1 D3.1 D4.1 D5.1 D6.1 D7.1 D8.1 D9.1 D10.1 D11.1 D12.1 D13.1 D14.1 D15.1 D16.1 D17.1 D18.1 D19.1 D20.1 D21.1 D22.1 D23.1 D24.1 D25.1 D26.1 D27.1 D28.1 D29.1 D30.1 D31.1 D32.1 D33.1 D34.1 D35.1 D36.1 D37.1 D38.1 D39.1 D40.1 D41.1 D42.1 D43.1 D44.1 D45.1 D46.1 D47.1 D48.1 D49.1 D50.1 DF0.1 DF1.1 DF2.1 DF3.1 DF4.1 DF5.1 DF6.1 DF7.1 DF8.1 DF9.1 DF10.1 DF11.1 DF12.1 DF13.1 DF14.1 DF15.1 L2.2 lm1117.3 lm2596.4 TJA1050.3 uart1.1 | length 27762.8
  Top Layer w10: v2(10945,16985) 11205,17245 11205,17320 11165,17360 11165,17385 11188,17408 11254.6,17408 C2.2@11320,17342.6
  Top Layer w20: v1(8685,17485) 8685,17280 8825,17140 8825,17077.28 v1(8885,17017.28) ; C2.2@11320,17342.6 11339.4,17362 TJA1050.3@11465.28,17362 ; C2.2@11320.82,17345.72 cw(c11360.13,17306.4) 11360.13,17362 ; C2.2@11334.96,17331.57 cw(c11408.42,17258.12) 11408.42,17362
  Top Layer w30: D50.1@8490.81,17809.19 ccw(c8468.62,17831.38) 8500,17831.38 ccw(c8531.38,17831.38) D50.1@8509.19,17809.19 ; D50.1@8500,17800 8500,17865 8510,17875 9700,17875 ; D49.1@8500,18200 8500,18215 8580,18295 8650,18295 ; D49.1@8513,18200 cw(c8580.6,18200) 8532.8,18247.8 ; D25.1@8640.81,18395.81 cw(c8618.62,18373.62) 8650,18373.62 cw(c8681.38,18373.62) D25.1@8659.19,18395.81 ; D25.1@8650,18405 8650,18295 ; D1.1@8790.81,17809.19 ccw(c8768.62,17831.38) 8800,17831.38 ccw(c8831.38,17831.38) D1.1@8809.19,17809.19 ; D41.1@8790.81,18209.19 ccw(c8768.62,18231.38) 8800,18231.38 ccw(c8831.38,18231.38) D41.1@8809.19,18209.19 ; D1.1@8800,17800 8800,17870 ; D41.1@8800,18200 8800,18295 ; C16.2@8860,17432.4 C15.1@8977.28,17432.4 ; 8890.75,17432.4 ccw(c8890.75,17532.71) C15.1@8961.68,17461.78 ; D26.1@8940.81,18395.81 cw(c8918.62,18373.62) 8950,18373.62 cw(c8981.38,18373.62) D26.1@8959.19,18395.81 ; 8950,18305 D26.1@8950,18405 ; D2.1@9090.81,17809.19 ccw(c9068.62,17831.38) 9100,17831.38 ccw(c9131.38,17831.38) D2.1@9109.19,17809.19 ; D42.1@9090.81,18209.19 ccw(c9068.62,18231.38) 9100,18231.38 ccw(c9131.38,18231.38) D42.1@9109.19,18209.19 ; D2.1@9100,17800 9100,17870 ; D42.1@9100,18200 9100,18295 ; D27.1@9240.81,18395.81 cw(c9218.62,18373.62) 9250,18373.62 cw(c9281.38,18373.62) D27.1@9259.19,18395.81 ; D27.1@9250,18405 9250,18295 ; v1(9300,17500) 9340.55,17540.55 lm1117.3@9399.17,17540.55 ; v1@9310.59,17510.59 cw(c9371.61,17449.56) lm1117.3@9371.61,17535.87 ; D3.1@9390.81,17809.19 ccw(c9368.62,17831.38) 9400,17831.38 ccw(c9431.38,17831.38) D3.1@9409.19,17809.19 ; D43.1@9390.81,18209.19 ccw(c9368.62,18231.38) 9400,18231.38 ccw(c9431.38,18231.38) D43.1@9409.19,18209.19 ; D3.1@9400,17800 9400,17870 ; D43.1@9400,18200 9400,18290 ; D28.1@9540.81,18395.81 cw(c9518.62,18373.62) 9550,18373.62 cw(c9581.38,18373.62) D28.1@9559.19,18395.81 ; D28.1@9550,18405 9550,18295 ; D4.1@9690.81,17809.19 ccw(c9668.62,17831.38) 9700,17831.38 ccw(c9731.38,17831.38) D4.1@9709.19,17809.19 ; D44.1@9690.81,18209.19 ccw(c9668.62,18231.38) 9700,18231.38 ccw(c9731.38,18231.38) D44.1@9709.19,18209.19 ; D4.1@9700,17800 9700,17875 ; D44.1@9700,18200 9700,18295 ; D29.1@9840.81,18395.81 cw(c9818.62,18373.62) 9850,18373.62 cw(c9881.38,18373.62) D29.1@9859.19,18395.81 ; 9850,18300 D29.1@9850,18405 ; D5.1@9990.81,17809.19 ccw(c9968.62,17831.38) 10000,17831.38 ccw(c10031.38,17831.38) D5.1@10009.19,17809.19 ; D45.1@9990.81,18209.19 ccw(c9968.62,18231.38) 10000,18231.38 ccw(c10031.38,18231.38) D45.1@10009.19,18209.19 ; D5.1@10000,17800 10000,17870 ; D45.1@10000,18200 10000,18290 ; D30.1@10140.81,18395.81 cw(c10118.62,18373.62) 10150,18373.62 cw(c10181.38,18373.62) D30.1@10159.19,18395.81 ; 10150,18305 D30.1@10150,18405 ; D6.1@10290.81,17809.19 ccw(c10268.62,17831.38) 10300,17831.38 ccw(c10331.38,17831.38) D6.1@10309.19,17809.19 ; D46.1@10290.81,18209.19 ccw(c10268.62,18231.38) 10300,18231.38 ccw(c10331.38,18231.38) D46.1@10309.19,18209.19 ; D6.1@10300,17800 10300,17870 ; D46.1@10300,18200 10300,18295 ; D31.1@10440.81,18395.81 cw(c10418.62,18373.62) 10450,18373.62 cw(c10481.38,18373.62) D31.1@10459.19,18395.81 ; D31.1@10450,18405 10450,18295 ; D7.1@10590.81,17809.19 ccw(c10568.62,17831.38) 10600,17831.38 ccw(c10631.38,17831.38) D7.1@10609.19,17809.19 ; D47.1@10590.81,18209.19 ccw(c10568.62,18231.38) 10600,18231.38 ccw(c10631.38,18231.38) D47.1@10609.19,18209.19 ; D7.1@10600,17800 10600,17870 ; D47.1@10600,18200 10600,18290 ; D32.1@10740.81,18395.81 cw(c10718.62,18373.62) 10750,18373.62 cw(c10781.38,18373.62) D32.1@10759.19,18395.81 ; 10750,18300 D32.1@10750,18405 ; D8.1@10890.81,17809.19 ccw(c10868.62,17831.38) 10900,17831.38 ccw(c10931.38,17831.38) D8.1@10909.19,17809.19 ; D48.1@10890.81,18209.19 ccw(c10868.62,18231.38) 10900,18231.38 ccw(c10931.38,18231.38) D48.1@10909.19,18209.19 ; D8.1@10900,17800 10900,17870 ; D48.1@10900,18200 10900,18285 ; D17.1@11040.81,18395.81 cw(c11018.62,18373.62) 11050,18373.62 cw(c11081.38,18373.62) D17.1@11059.19,18395.81 ; 11050,18300 D17.1@11050,18405 ; D9.1@11190.81,17809.19 ccw(c11168.62,17831.38) 11200,17831.38 ccw(c11231.38,17831.38) D9.1@11209.19,17809.19 ; D33.1@11190.81,18209.19 ccw(c11168.62,18231.38) 11200,18231.38 ccw(c11231.38,18231.38) D33.1@11209.19,18209.19 ; D9.1@11200,17800 11200,17870 ; D33.1@11200,18200 11200,18290 ; D18.1@11340.81,18395.81 cw(c11318.62,18373.62) 11350,18373.62 cw(c11381.38,18373.62) D18.1@11359.19,18395.81 ; 11350,18305 D18.1@11350,18405 ; D10.1@11490.81,17809.19 ccw(c11468.62,17831.38) 11500,17831.38 ccw(c11531.38,17831.38) D10.1@11509.19,17809.19 ; D34.1@11490.81,18209.19 ccw(c11468.62,18231.38) 11500,18231.38 ccw(c11531.38,18231.38) D34.1@11509.19,18209.19 ; D10.1@11500,17800 11500,17870 ; D34.1@11500,18200 11500,18290 ; D19.1@11640.81,18395.81 cw(c11618.62,18373.62) 11650,18373.62 cw(c11681.38,18373.62) D19.1@11659.19,18395.81 ; 11650,18300 D19.1@11650,18405 ; D11.1@11790.81,17809.19 ccw(c11768.62,17831.38) 11800,17831.38 ccw(c11831.38,17831.38) D11.1@11809.19,17809.19 ; D35.1@11790.81,18209.19 ccw(c11768.62,18231.38) 11800,18231.38 ccw(c11831.38,18231.38) D35.1@11809.19,18209.19 ; D11.1@11800,17800 11800,17875 ; D35.1@11800,18200 11800,18295 ; D20.1@11940.81,18395.81 cw(c11918.62,18373.62) 11950,18373.62 cw(c11981.38,18373.62) D20.1@11959.19,18395.81 ; D20.1@11950,18405 11950,18295 ; D12.1@12090.81,17809.19 ccw(c12068.62,17831.38) 12100,17831.38 ccw(c12131.38,17831.38) D12.1@12109.19,17809.19 ; D36.1@12090.81,18209.19 ccw(c12068.62,18231.38) 12100,18231.38 ccw(c12131.38,18231.38) D36.1@12109.19,18209.19 ; D12.1@12100,17800 12100,17875 ; D36.1@12100,18200 12100,18285 ; D21.1@12240.81,18395.81 cw(c12218.62,18373.62) 12250,18373.62 cw(c12281.38,18373.62) D21.1@12259.19,18395.81 ; 12250,18300 D21.1@12250,18405 ; D13.1@12390.81,17809.19 ccw(c12368.62,17831.38) 12400,17831.38 ccw(c12431.38,17831.38) D13.1@12409.19,17809.19 ; D37.1@12390.81,18209.19 ccw(c12368.62,18231.38) 12400,18231.38 ccw(c12431.38,18231.38) D37.1@12409.19,18209.19 ; D13.1@12400,17800 12400,17870 ; D37.1@12400,18200 12400,18295 ; D22.1@12540.81,18395.81 cw(c12518.62,18373.62) 12550,18373.62 cw(c12581.38,18373.62) D22.1@12559.19,18395.81 ; D22.1@12550,18405 12550,18295 ; D14.1@12690.81,17809.19 ccw(c12668.62,17831.38) 12700,17831.38 ccw(c12731.38,17831.38) D14.1@12709.19,17809.19 ; D38.1@12690.81,18209.19 ccw(c12668.62,18231.38) 12700,18231.38 ccw(c12731.38,18231.38) D38.1@12709.19,18209.19 ; D14.1@12700,17800 12700,17870 ; D38.1@12700,18200 12700,18290 ; D23.1@12840.81,18395.81 cw(c12818.62,18373.62) 12850,18373.62 cw(c12881.38,18373.62) D23.1@12859.19,18395.81 ; 12850,18300 D23.1@12850,18405 ; D15.1@12990.81,17809.19 ccw(c12968.62,17831.38) 13000,17831.38 ccw(c13031.38,17831.38) D15.1@13009.19,17809.19 ; D39.1@12990.81,18209.19 ccw(c12968.62,18231.38) 13000,18231.38 ccw(c13031.38,18231.38) D39.1@13009.19,18209.19 ; D15.1@13000,17800 13000,17870 ; D39.1@13000,18200 13000,18280 ; D24.1@13140.81,18395.81 cw(c13118.62,18373.62) 13150,18373.62 cw(c13181.38,18373.62) D24.1@13159.19,18395.81 ; 13150,18300 D24.1@13150,18405 ; D40.1@13287,18200 ccw(c13255.62,18200) 13277.81,18222.19 ccw(c13300,18244.38) D40.1@13300,18213 ; D16.1@13290.81,17809.19 ccw(c13268.62,17831.38) 13300,17831.38 ccw(c13331.38,17831.38) D16.1@13309.19,17809.19 ; D40.1@13290.81,18190.81 cw(c13268.62,18168.62) 13300,18168.62 cw(c13331.38,18168.62) D40.1@13309.19,18190.81 ; D16.1@13300,17800 13300,17875 ; 13305,18135 13385,18135 13550,17970 13550,17905 13600,17855 13695,17855 uart1.1@14020,17530 14125,17530 14285,17370 ; uart1.1@14005.47,17530 ccw(c13970.4,17530) 13995.2,17554.8 ccw(c14020,17579.6) uart1.1@14020,17544.53 ; uart1.1@14030.27,17519.73 cw(c14055.07,17494.93) 14055.07,17530 cw(c14055.07,17565.07) uart1.1@14030.27,17540.27 ; v1(14395,17480) 14285,17370 ; C19.1@14460,17130 14460,17195 14285,17370 ; 8650,18295 8800,18295 ; 8800,18295 9100,18295 ; 9100,18295 9250,18295 ; 9250,18295 9550,18295 ; 9550,18295 9700,18295 ; 9700,17875 11800,17875 ; 9700,18295 10300,18295 ; 10300,18295 10450,18295 ; 10450,18295 11800,18295 ; 11800,17875 12100,17875 ; 11800,18295 11950,18295 ; 11950,18295 12400,18295 ; 12100,17875 13300,17875 ; 12400,18295 12550,18295 ; 12550,18295 13205,18295 D40.1@13300,18200 13300,18050 13355,17995 13355,17930 13300,17875
  Bottom Layer w20: 10945,16910 v2(10945,16985)
  Bottom Layer w30: C23.1@8394.91,17698.57 cw(c8298.13,17601.8) 8435,17601.8 ; C23.1@8402.4,17724.53 ccw(c8402.4,17777.94) 8440.17,17740.17 ; C23.1@8403.8,17724.43 ccw(c8408.71,17761.29) 8435,17735 ; C22.1@8405,18242.4 8457.6,18242.4 D49.1@8500,18200 ; C20.1@8405,18442.4 8612.6,18442.4 D25.1@8650,18405 ; C23.1@8416.13,17719.79 cw(c8370.56,17674.22) 8435,17674.22 ; D50.1@8487,17800 cw(c8455.62,17800) 8477.81,17777.81 cw(c8500,17755.62) D50.1@8500,17787 ; D49.1@8487,18200 ccw(c8455.62,18200) 8477.81,18222.19 ccw(c8500,18244.38) D49.1@8500,18213 ; D50.1@8500,17800 8435,17735 ; D25.1@8637,18405 ccw(c8605.62,18405) 8627.81,18427.19 ccw(c8650,18449.38) D25.1@8650,18418 ; DF0.1@8785,17017.28 v1(8885,17017.28) DF1.1@8985,17017.28 DF2.1@9185,17017.28 DF3.1@9385,17017.28 DF4.1@9585,17017.28 DF5.1@9785,17017.28 DF6.1@9985,17017.28 DF7.1@10185,17017.28 10377.72,17017.28 10495,16900 10935,16900 ; 9263.79,17485 ccw(c9263.79,17536.21) v1(9300,17500) 9285,17485 v1(8685,17485) 8505,17485 8435,17555 8435,17735 ; 10945,16900 11190,16900 11302.28,17012.28 DF8.1@11360,17012.28 DF9.1@11560,17012.28 DF10.1@11760,17012.28 DF11.1@11960,17012.28 DF12.1@12160,17012.28 DF13.1@12360,17012.28 DF14.1@12560,17012.28 DF15.1@12760,17012.28 ; 13788,17823.46 cw(c13726.54,17823.46) v1(13770,17780) 13788,17798 lm2596.4@13788,17925 ; can2.1@14009.73,17229.73 cw(c13984.93,17204.93) 14020,17204.93 cw(c14055.07,17204.93) can2.1@14030.27,17229.73 ; can2.1@14009.73,17250.27 ccw(c13984.93,17275.07) 14020,17275.07 ccw(c14055.07,17275.07) can2.1@14030.27,17250.27 ; uart1.1@14009.73,17519.73 cw(c13984.93,17494.93) 14020,17494.93 cw(c14055.07,17494.93) uart1.1@14030.27,17519.73 ; can1.1@14020,16955 can2.1@14020,17240 uart1.1@14020,17530 ; 14020,16997.14 ccw(c14072.14,16997.14) can1.1@14035.27,16960.27
  other v1: 8995,17480
VCC12V: C18.1 lm2596.1 power1.1 power2.1 | length 2476.3
  Top Layer w30: C18.1@14420,18135 14555,18135 power1.1@14800,17890 14770,17890 14645,17765 14645,17535 power2.1@14800,17380 ; C18.1@14437.68,18117.32 cw(c14480.36,18074.64) 14480.36,18135 cw(c14480.36,18195.36) C18.1@14437.68,18152.68 ; 14673.58,17793.58 cw(c14800,17667.16) power1.1@14800,17845.94 ; 14711.26,17468.74 cw(c14627.52,17385) power2.1@14745.94,17385 ; 14723.33,17456.67 ccw(c14790,17523.34) power2.1@14790,17429.06 ; 14724.79,17844.79 cw(c14800,17769.59) power1.1@14800,17875.94 ; power1.1@14746.01,17866.01 ccw(c14722.01,17890) 14755.94,17890 ccw(c14649.59,17890) 14724.79,17965.21 ccw(c14800,18040.41) power1.1@14800,17934.06
  Bottom Layer w30: lm2596.1@13989,17925 13999,17915 14200,17915 C18.1@14420,18135 ; lm2596.1@13993.24,17929.24 ccw(c14027.63,17963.63) 14027.63,17915 ; C18.1@14395,18135 cw(c14334.64,18135) 14377.32,18092.32 cw(c14420,18049.64) C18.1@14420,18110
pads on no net: boot0.0 S0.2 S1.2 S2.2 S3.2 S4.2 S5.2 S6.2 S7.2 S8.2 S9.2 S10.2 S11.2 S12.2 S13.2 S14.2 S15.2 TJA1050.5 U1.1 U1.2 U1.50 U1.54 U1.55 U1.56

## Polygon pours and split planes (outlines as drawn)
GND on Top Layer "Top Layer-No Net" (solid, remove dead copper, pour order 4): 7470,19140 7385,19055 7385,16270 15390,16270 15530,16410 15320,16620 15320,19155
GND on Bottom Layer "Top Layer-No Net" (solid, remove dead copper, pour order 6): 7890,19430 7890,15955 7850,15915 7925,15990 16025,15990 16025,19180 15945,19260

## Keep-outs
Keep-Out Layer:
  lines w10: 8210,16810 8210,17650 8210,18575 14920,18575 14920,16810 8210,16810

## Other copper
Top Layer:
  rectangle net GND: 13670,18075 13852.5,18425
  rectangle net GND: 13675,18001.81 13852.5,18100
  rectangle net GND: 12799.53,16825 13690,16921.81
  rectangle net GND: 13679.75,16825 14045,16908.55
Bottom Layer:
  rectangle net GND: 12806.21,16825 13685,16925
  rectangle net GND: 13670,16825 14060,16905
  rectangle net GND: 13679.75,16845 14060,16908.55
  rectangle net GND: 13955,16908.55 13959.75,16909.5

## Silkscreen, mask and mechanical layers (free items; w line width, h text height)
Top Overlay:
  lines w10: 14245,16810 14245,16995 ; 14245,18358 14620,18358 ; 14245,18575 14245,18356 14245,16980 14620,16980
Bottom Overlay:
  drawing of 60 lines, arcs and shapes, not listed
  text "Hole Size" at 14660,18480 h45
  text "3.2mm" at 14490,18385 h45
  text "Sensor Bar v2.0" at 10250,17530 h60
  text "Designed by GAO Zihou" at 10415,17380 h60
  text "2014.06" at 10010,17245 h60
  text "hole dist" at 14515,16900 h45
  text "0" at 8800,16835 h45
  text "0" at 8800,16835 h45
  text "1" at 9000,16835 h45
  text "2" at 9200,16835 h45
  text "3" at 9400,16835 h45
  text "4" at 9600,16835 h45
  text "5" at 9800,16835 h45
  text "6" at 10000,16835 h45
  text "7" at 10200,16835 h45
  text "8" at 11375,16835 h45
  text "9" at 11575,16835 h45
  text "10" at 11775,16835 h45
  text "11" at 11975,16835 h45
  text "12" at 12175,16835 h45
  text "13" at 12375,16835 h45
  text "14" at 12575,16835 h45
  text "15" at 12775,16835 h45
  text "35mm" at 14420,16835 h45

## Dimensions
8210,18575 to 8210,16810 on Mechanical 1
8210,18575 to 14920,18575 on Mechanical 1

## Text inside footprints (layer, text, board x,y; h text height)
C18: Bottom Overlay "+" at 14380,18045 h45 r270
C19: Bottom Overlay "+" at 14405,17070 h45 r270
S0: Top Overlay "3" at 8855,19965 h45; Top Overlay "2" at 8682.56,19789.17 h45; Top Overlay "1" at 8527.56,19971.69 h45
S1: Top Overlay "3" at 9150.08,19970.79 h45; Top Overlay "2" at 8982.56,19789.17 h45; Top Overlay "1" at 8827.56,19971.69 h45
S2: Top Overlay "3" at 9450.08,19970.79 h45; Top Overlay "2" at 9282.56,19789.17 h45; Top Overlay "1" at 9127.56,19971.69 h45
S3: Top Overlay "3" at 9750.08,19970.79 h45; Top Overlay "2" at 9582.56,19789.17 h45; Top Overlay "1" at 9427.56,19971.69 h45
S4: Top Overlay "3" at 10050.08,19970.79 h45; Top Overlay "2" at 9882.56,19789.17 h45; Top Overlay "1" at 9727.56,19971.69 h45
S5: Top Overlay "3" at 10350.08,19970.79 h45; Top Overlay "2" at 10182.56,19789.17 h45; Top Overlay "1" at 10027.56,19971.69 h45
S6: Top Overlay "3" at 10650.08,19970.79 h45; Top Overlay "2" at 10482.56,19789.17 h45; Top Overlay "1" at 10327.56,19971.69 h45
S7: Top Overlay "3" at 10950.08,19970.79 h45; Top Overlay "2" at 10782.56,19789.17 h45; Top Overlay "1" at 10627.56,19971.69 h45
S8: Top Overlay "3" at 11250.08,19970.79 h45; Top Overlay "2" at 11082.56,19789.17 h45; Top Overlay "1" at 10927.56,19971.69 h45
S9: Top Overlay "3" at 11550.08,19970.79 h45; Top Overlay "2" at 11382.56,19789.17 h45; Top Overlay "1" at 11227.56,19971.69 h45
S10: Top Overlay "3" at 11850.08,19970.79 h45; Top Overlay "2" at 11682.56,19789.17 h45; Top Overlay "1" at 11527.56,19971.69 h45
S11: Top Overlay "3" at 12150.08,19970.79 h45; Top Overlay "2" at 11982.56,19789.17 h45; Top Overlay "1" at 11827.56,19971.69 h45
S12: Top Overlay "3" at 12450.08,19970.79 h45; Top Overlay "2" at 12282.56,19789.17 h45; Top Overlay "1" at 12127.56,19971.69 h45
S13: Top Overlay "3" at 12750.08,19970.79 h45; Top Overlay "2" at 12582.56,19789.17 h45; Top Overlay "1" at 12427.56,19971.69 h45
S14: Top Overlay "3" at 13050.08,19970.79 h45; Top Overlay "2" at 12882.56,19789.17 h45; Top Overlay "1" at 12727.56,19971.69 h45
S15: Top Overlay "3" at 13350.08,19970.79 h45; Top Overlay "2" at 13182.56,19789.17 h45; Top Overlay "1" at 13027.56,19971.69 h45